# Altium PCB call-2014-06.PcbDoc (part 2 of 2)
Units mm, origin at the board's own origin, x right, y up, seen from the top; angles counter-clockwise.
Board outline 60 x 92 mm, 2 copper layers (Top Layer, Bottom Layer); 65 components, 45 nets, 265 pads, 33 vias.
Unrouted connection lines stored in the file: 4.
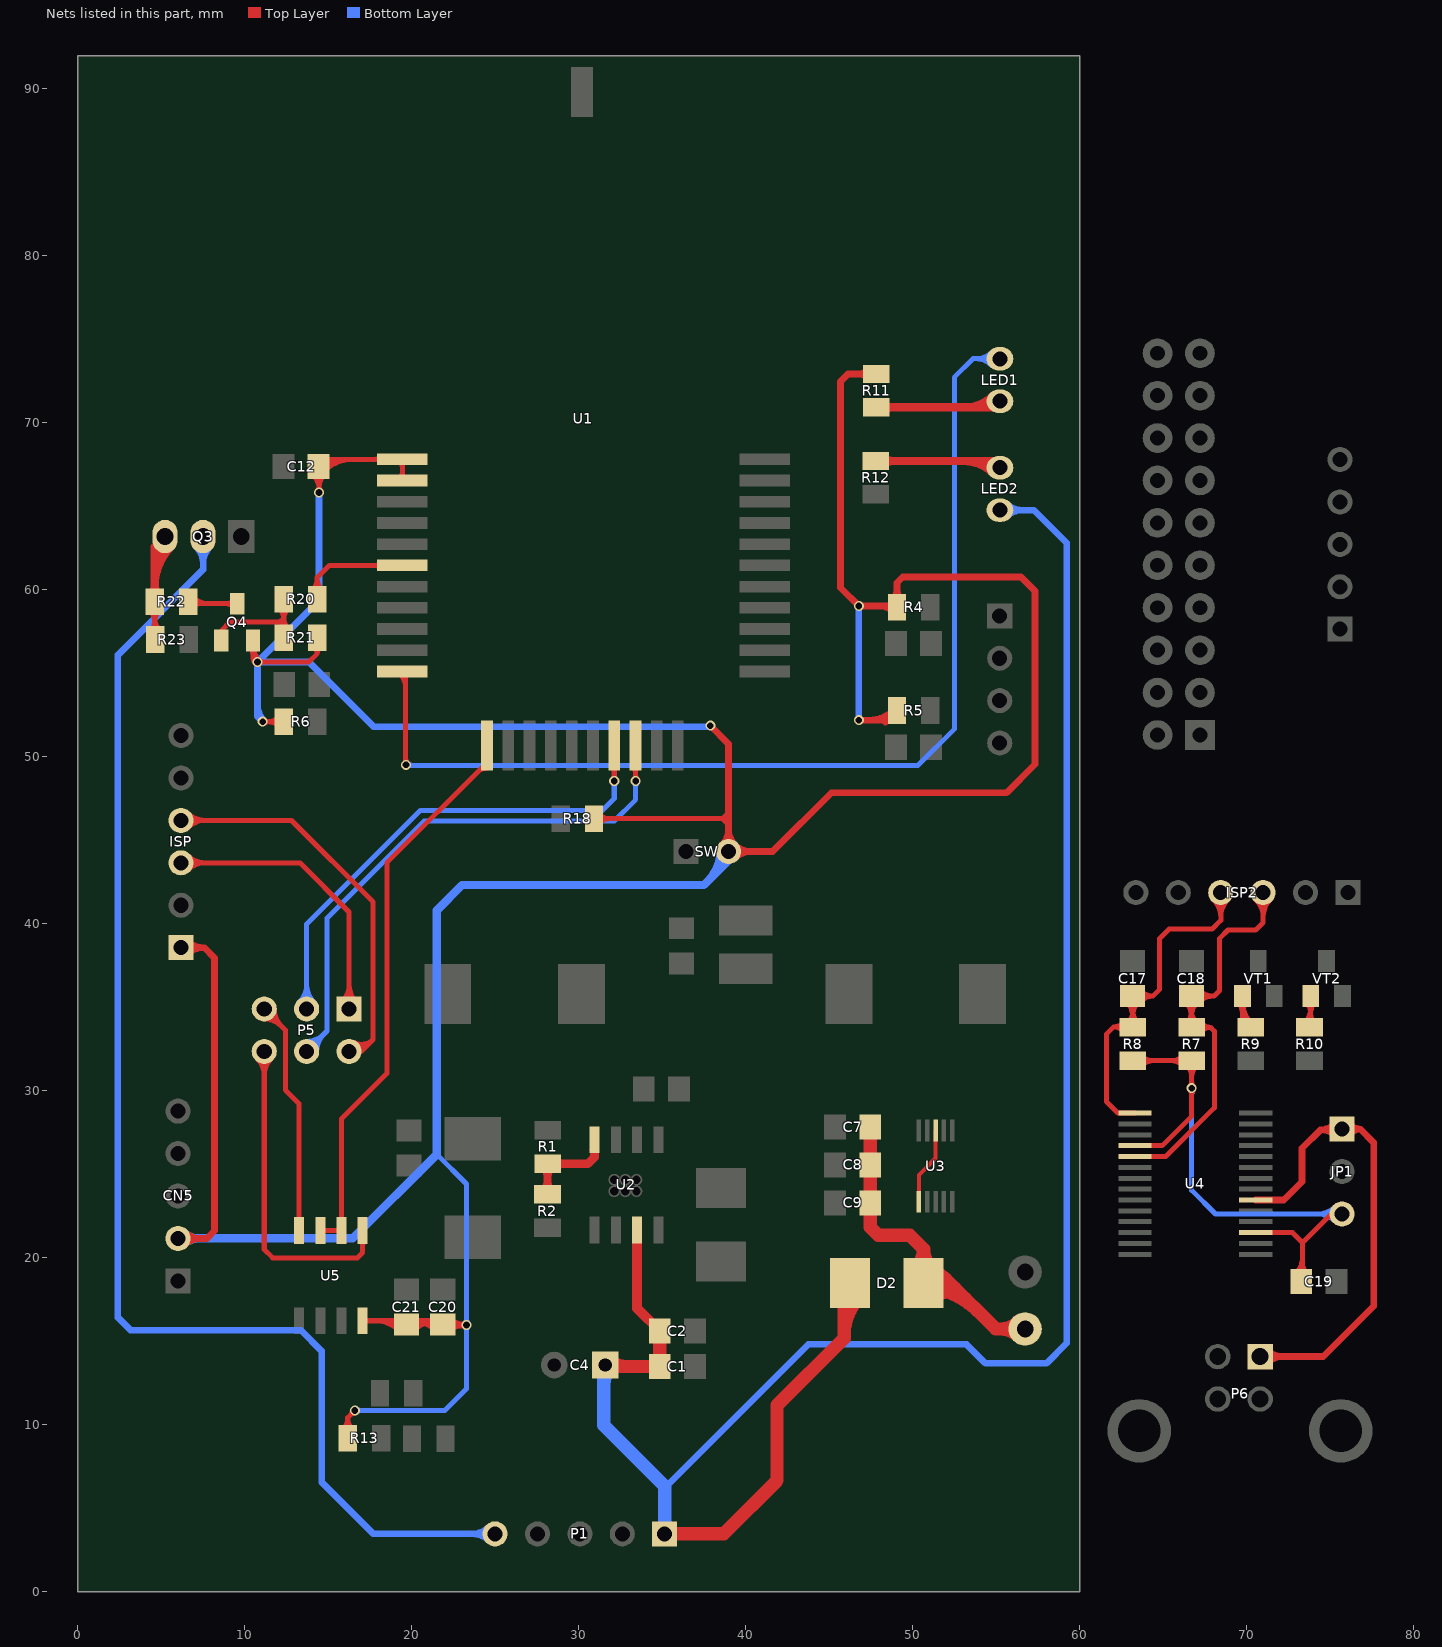
[diagram p2: the nets of this part, all layers, seen from the top]

## Via types
v1: diameter 0.6, hole 0.4, Top Layer to Bottom Layer, 33 vias

## Nets (pads, with @x,y where several pads share a name; then routed paths per layer and width w, separated by ;. In a path a pad name is that pad's centre, name@x,y a point inside that pad or via, vN(x,y) a via of type N, cw(c..) or ccw(c..) an arc to the next point about the centre after c; other vN are vias at no path point) (continued)
NetLED1_1: LED1.1 R11.2 | length 11.4
  Top Layer w0.5: R11.2@47.82,70.93 54.86,70.93 LED1.1@55.23,71.3 ; R11.2@48.282,70.718 cw(c48.794,70.206) 48.794,70.93 cw(c48.794,71.654) R11.2@48.282,71.142 ; 53.15,70.93 ccw(c53.15,73.28) LED1.1@54.812,71.618 ; 54.357,70.93 ccw(c54.357,72.073) LED1.1@55.165,71.265
NetLED2_2: LED2.2 R12.2 | length 11.6
  Top Layer w0.5: R12.2@47.79,67.72 54.83,67.72 LED2.2@55.23,67.32 ; R12.2@48.252,67.508 cw(c48.764,66.996) 48.764,67.72 cw(c48.764,68.444) R12.2@48.252,67.932 ; 53.078,67.72 cw(c53.078,65.268) LED2.2@54.812,67.002 ; 54.285,67.72 cw(c54.285,66.475) LED2.2@55.165,67.355
NetQ3_3: Q3.3 R22.1 R23.2 | length 14.9
  Top Layer w0.3: R22.1@4.337,58.757 cw(c3.654,58.074) 4.62,58.074 cw(c5.586,58.074) R22.1@4.903,58.757 ; R23.2@4.367,57.563 ccw(c3.757,58.173) 4.62,58.173 ; 4.62,58.318 ccw(c5.688,58.318) R23.2@4.933,57.563 ; R22.1@4.62,59.29 4.62,57.06 R23.2@4.65,57.03
  Top Layer w0.5: R22.1@4.408,59.752 ccw(c3.896,60.264) 4.62,60.264 ccw(c5.344,60.264) R22.1@4.832,59.752 ; R22.1@4.62,59.29 4.62,62.579 Q3.3@5.24,63.199 ; 4.62,60.245 cw(c7.944,60.245) Q3.3@5.594,62.595 ; 4.62,61.452 cw(c6.737,61.452) Q3.3@5.24,62.949
NetQ4_1: Q4.1 R20.1 R21.1 | length 10
  Top Layer w0.3: Q4.1@8.611,56.975 8.611,57.552 9.134,58.075 12.126,58.075 12.351,58.3 ; R21.1@12.068,57.663 ccw(c11.385,58.346) 12.351,58.346 ccw(c13.317,58.346) R21.1@12.634,57.663 ; R20.1@12.068,58.917 cw(c11.385,58.234) 12.351,58.234 cw(c13.317,58.234) R20.1@12.634,58.917 ; R21.1@12.351,57.13 R20.1@12.351,59.45
NetQ4_3: Q4.3 R22.2 | length 5.5
  Top Layer w0.3: R22.2@6.62,59.29 6.735,59.175 Q4.3@9.561,59.175 ; R22.2@6.903,59.007 cw(c7.308,58.602) 7.308,59.175 ; R22.2@6.903,59.573 ccw(c7.863,60.533) 7.863,59.175 ; Q4.3@9.367,58.981 ccw(c8.897,58.511) 8.897,59.175 ccw(c8.897,59.839) Q4.3@9.367,59.369
NetR1_1: R1.1 R2.1 U2.4 | length 9.9
  Top Layer w0.5: R2.1@27.928,24.022 ccw(c27.416,24.534) 28.14,24.534 ccw(c28.864,24.534) R2.1@28.352,24.022 ; R1.1@27.938,25.438 cw(c27.45,24.95) 28.14,24.95 ; R2.1@28.14,23.81 R1.1@28.14,25.64 ; 28.14,24.902 cw(c28.898,24.902) R1.1@28.362,25.438 ; R1.1@28.15,25.65 R1.1@28.14,25.64 ; R1.1@28.612,25.438 cw(c29.1,24.95) 29.1,25.64 ; R1.1@28.612,25.862 ccw(c29.148,26.398) 29.148,25.64 ; 30.787,25.857 ccw(c30.385,26.259) U2.4@30.919,26.453 ; U2.4@30.966,27.07 30.966,26.036 30.57,25.64 R1.1@28.14,25.64
NetR9_1: R9.1 VT1.1 | length 5.8
  Top Layer w0.3: VT1.1@69.505,35.283 cw(c68.908,34.685) 69.753,34.685 cw(c70.598,34.685) VT1.1@70,35.283 ; 69.753,34.632 ccw(c70.816,34.632) R9.1@70.064,33.881 ; VT1.1@69.753,35.357 ccw(c71.54,35.357) R9.1@70.276,34.093 ; VT1.1@69.753,35.68 69.753,33.817 R9.1@70.03,33.54
NetR10_1: R10.1 VT2.1 | length 4.7
  Top Layer w0.3: R10.1@73.487,34.093 ccw(c72.635,34.945) 73.84,34.945 ; VT2.1@73.593,35.283 cw(c72.995,34.685) 73.84,34.685 cw(c74.685,34.685) VT2.1@74.087,35.283 ; 73.84,34.607 ccw(c74.567,34.607) R10.1@74.053,34.093 ; VT2.1@73.84,35.68 73.84,34.06 R10.1@74.01,33.89
NetR20_2: R20.2 U1.6 | length 9
  Top Layer w0.3: R20.2@14.068,59.983 ccw(c13.38,60.671) 14.353,60.671 ; R20.2@14.351,59.45 14.353,59.452 14.353,60.741 15.082,61.47 U1.6@19.446,61.47 ; 14.353,60.661 ccw(c15.312,60.661) R20.2@14.634,59.983 ; U1.6@18.155,61.329 ccw(c17.813,60.987) 17.813,61.47 ccw(c17.813,61.953) U1.6@18.155,61.611
PA1: LED1.2 U1.11 | length 67
  Top Layer w0.3: U1.11@19.305,54.979 cw(c18.5,54.174) 19.638,54.174 ; U1.11@19.446,55.12 19.638,54.928 v1@19.638,49.526 ; 19.638,49.97 ccw(c20.116,49.97) v1@19.778,49.632
  Bottom Layer w0.3: v1@19.718,49.495 50.33,49.495 52.499,51.664 52.499,72.729 53.622,73.852 LED1.2@54.899,73.852 ; v1@19.778,49.632 ccw(c20.109,49.963) 20.109,49.495 ; 53.773,73.852 cw(c53.773,72.483) LED1.2@54.741,73.451 ; 53.831,73.852 ccw(c53.831,75.139) LED1.2@54.741,74.229
  other v1: 19.672,49.526
RW: P1.5 Q3.2 | length 85.6
  Bottom Layer w0.4: Q3.2@7.131,62.56 cw(c6.192,61.621) 7.52,61.621 cw(c8.848,61.621) Q3.2@7.909,62.56 ; Q3.2@7.52,63.199 7.52,61.216 2.412,56.108 2.412,16.432 3.165,15.679 13.364,15.679 14.619,14.424 14.619,6.581 17.72,3.48 P1.5@25,3.48 ; P1.5@24.611,3.091 ccw(c23.672,2.152) 23.672,3.48 ccw(c23.672,4.808) P1.5@24.611,3.869
SHINENG: U1.12 U5.2 U5.3 | length 36.2
  Top Layer w0.3: U5.3@14.536,21.64 U5.2@15.806,21.64 15.806,28.326 18.52,31.04 18.52,43.658 24.518,49.656 U1.12@24.518,50.683 ; U5.3@14.642,21.534 cw(c14.898,21.278) 14.898,21.64 cw(c14.898,22.002) U5.3@14.642,21.746 ; U5.2@15.7,21.534 ccw(c15.444,21.278) 15.444,21.64 ccw(c15.444,22.002) U5.2@15.7,21.746 ; U5.2@15.7,22.246 ccw(c15.444,22.502) 15.806,22.502 ccw(c16.168,22.502) U5.2@15.912,22.246 ; 23.967,49.105 cw(c24.518,48.553) U1.12@24.518,49.333
UART_RXD: P5.5 U1.19 | length 37.3
  Top Layer w0.3: U1.19@33.267,49.392 cw(c32.9,49.025) 33.419,49.025 ; v1@33.312,48.665 ccw(c33.056,48.921) 33.419,48.921 ccw(c33.781,48.921) v1@33.525,48.665 ; U1.19@33.408,50.683 33.419,50.673 v1(33.419,48.559) ; 33.419,49.076 cw(c33.865,49.076) U1.19@33.549,49.392
  Bottom Layer w0.3: P5.5@13.72,32.37 14.941,33.591 14.941,40.349 20.753,46.161 32.142,46.161 33.419,47.437 v1(33.419,48.559) ; P5.5@13.72,32.97 ccw(c13.72,34.419) 14.744,33.394 ccw(c15.769,32.37) P5.5@14.32,32.37 ; v1@33.312,48.453 cw(c33.056,48.197) 33.419,48.197 cw(c33.781,48.197) v1@33.525,48.453
"UART_RXD 485": P5.6 U5.1 | length 22.3
  Top Layer w0.3: P5.6@10.756,31.946 cw(c9.731,30.921) 11.18,30.921 cw(c12.629,30.921) P5.6@11.604,31.946 ; P5.6@11.18,32.37 11.18,20.512 11.682,20.01 16.76,20.01 17.076,20.326 U5.1@17.076,21.64 ; U5.1@16.97,21.034 cw(c16.714,20.778) 17.076,20.778 cw(c17.438,20.778) U5.1@17.182,21.034
UART_RXD_USB: C18.2 ISP2.3 ISP.3 P5.1 R7.1 U4.5 | length 54.1
  Top Layer w0.3: ISP.3@6.19,43.66 13.32,43.66 16.26,40.72 P5.1@16.26,34.91 ; ISP.3@6.614,43.236 cw(c7.639,42.211) 7.639,43.66 cw(c7.639,45.109) ISP.3@6.614,44.084 ; P5.1@15.836,35.334 ccw(c14.811,36.359) 16.26,36.359 ccw(c17.709,36.359) P5.1@16.684,35.334 ; U4.5@63.32,26.07 65.155,26.07 68.07,28.985 68.07,33.58 67.84,33.81 ; C18.2@66.344,35.326 cw(c65.49,34.473) 66.697,34.473 cw(c67.904,34.473) C18.2@67.051,35.326 ; R7.1@66.434,34.093 ccw(c65.798,34.729) 66.697,34.729 ; 66.697,34.822 ccw(c67.729,34.822) R7.1@67,34.093 ; C18.2@67.151,35.326 cw(c68.004,34.473) 68.004,35.68 cw(c68.004,36.887) C18.2@67.151,36.034 ; R7.1@67.27,33.549 cw(c67.84,33.057) 67.84,33.81 ; R7.1@67.27,34.071 ccw(c67.84,34.563) 67.84,33.81 ; ISP2.3@70.566,41.456 cw(c69.541,40.431) 70.99,40.431 cw(c72.439,40.431) ISP2.3@71.414,41.456 ; ISP2.3@70.99,41.88 70.99,40.08 70.55,39.64 68.89,39.64 68.39,39.14 68.39,36.02 68.05,35.68 C18.2@66.697,35.68 66.697,33.829 R7.1@66.717,33.81 67.84,33.81
UART_TXD: P5.2 U1.18 | length 34
  Top Layer w0.3: U1.18@31.997,49.392 cw(c31.655,49.05) 32.138,49.05 cw(c32.621,49.05) U1.18@32.279,49.392 ; v1@32.032,48.665 ccw(c31.776,48.921) 32.138,48.921 ccw(c32.5,48.921) v1@32.244,48.665 ; v1(32.138,48.559) U1.18@32.138,50.683
  Bottom Layer w0.3: P5.2@13.296,35.334 ccw(c12.271,36.359) 13.72,36.359 ccw(c15.169,36.359) P5.2@14.144,35.334 ; P5.2@13.72,34.91 13.72,39.993 20.524,46.797 31.423,46.797 32.138,47.512 v1(32.138,48.559) ; v1@32.032,48.453 cw(c31.776,48.197) 32.138,48.197 cw(c32.5,48.197) v1@32.244,48.453
"UART_TXD 485": P5.3 U5.4 | length 17
  Top Layer w0.3: P5.3@11.18,34.31 cw(c11.18,32.861) 12.204,33.886 cw(c13.229,34.91) P5.3@11.78,34.91 ; P5.3@11.18,34.91 12.45,33.64 12.45,30.05 13.266,29.234 U5.4@13.266,21.64 ; U5.4@13.16,22.246 ccw(c12.904,22.502) 13.266,22.502 ccw(c13.628,22.502) U5.4@13.372,22.246
UART_TXD_USB: C17.2 ISP2.4 ISP.4 P5.4 R8.1 U4.1 | length 58.3
  Top Layer w0.3: ISP.4@6.19,46.2 12.81,46.2 17.7,41.31 17.7,33.08 ; ISP.4@6.614,45.776 cw(c7.639,44.751) 7.639,46.2 cw(c7.639,47.649) ISP.4@6.614,46.624 ; P5.4@15.99,32.35 16.97,32.35 17.7,33.08 ; P5.4@16.26,32.37 ccw(c16.601,33.023) 17.122,32.502 ; P5.4@16.399,32.636 ccw(c16.799,33.403) 17.411,32.791 ; P5.4@16.538,32.902 ccw(c16.998,33.782) 17.7,33.08 ; 62.047,33.84 ccw(c62.047,34.703) R8.1@62.657,34.093 ; R8.1@62.629,33.559 ccw(c62.04,33.083) 62.04,33.84 ; C17.2@62.826,35.326 cw(c61.973,34.473) 63.18,34.473 cw(c64.387,34.473) C17.2@63.534,35.326 ; R8.1@62.907,34.093 ccw(c62.248,34.752) 63.18,34.752 ; R8.1@63.18,33.82 C17.2@63.18,35.68 64.39,35.68 ; 63.18,34.8 ccw(c64.18,34.8) R8.1@63.473,34.093 ; R8.1@63.19,33.81 63.16,33.84 62.04,33.84 ; U4.1@63.32,28.67 62.3,28.67 61.6,29.37 61.6,33.4 62.04,33.84 ; C17.2@63.654,35.349 cw(c64.39,34.698) 64.39,35.68 ; C17.2@63.654,36.011 ccw(c64.39,36.662) 64.39,35.68 ; ISP2.4@68.026,41.456 cw(c66.977,40.407) 68.46,40.407 ; ISP2.4@68.45,41.88 68.46,41.87 68.46,40.22 67.93,39.69 65.36,39.69 64.8,39.13 64.8,36.09 64.39,35.68 ; 68.46,40.456 cw(c69.874,40.456) ISP2.4@68.874,41.456
VCC: JP1.1 P6.1 U4.20 | length 33.8
  Top Layer w0.4: U4.20@70.559,23.47 72.23,23.47 73.32,24.56 73.32,26.57 74.42,27.67 ; P6.1@70.815,14.095 74.595,14.095 77.61,17.11 77.61,26.92 76.82,27.71 ; P6.1@71.212,13.697 cw(c72.173,12.736) 72.173,14.095 cw(c72.173,15.453) P6.1@71.212,14.492 ; 74.489,27.67 cw(c74.489,26.479) JP1.1@75.331,27.321 ; JP1.1@75.306,28.072 cw(c74.42,28.847) 74.42,27.67 ; JP1.1@76.16,27.38 cw(c76.82,26.885) 76.82,27.71 ; JP1.1@76.16,28.04 ccw(c76.82,28.535) 76.82,27.71 ; 74.42,27.67 75.68,27.67 JP1.1@75.72,27.71 76.82,27.71
VCC_9V: C7.2 C8.2 C9.2 D2.1 pad.0@56.74,15.75 U3.1 U3.8 | length 42.9
  Top Layer w0.254: U3.1@50.38,23.36 50.38,24.973 51.38,25.973 U3.8@51.38,27.635
  Top Layer w0.8: C7.2@47.51,28.102 47.464,28.056 47.464,21.832 47.946,21.35 49.83,21.35 50.66,20.52 ; D2.1@50.121,18.781 cw(c51.029,17.785) 51.982,18.738 ; D2.1@50.142,19.4 ccw(c49.19,20.52) 50.66,20.52 ; D2.1@50.66,18.99 cw(c50.66,16.404) 52.488,18.233 ; D2.1@51.178,19.4 cw(c52.13,20.52) 50.66,20.52 ; D2.1@51.199,17.599 cw(c52.16,16.548) 53.166,17.555 ; D2.1@51.307,18.019 cw(c52.231,17.348) 52.231,18.49 ; D2.1@51.307,18.961 ccw(c52.231,19.632) 52.231,18.49 ; 52.574,18.147 ccw(c51.594,17.167) 50.66,18.19 cw(c50.66,13.673) 53.854,16.867 ; pad.0@56.316,15.326 ccw(c55.291,14.301) 55.291,15.75 ccw(c55.291,17.199) pad.0@56.316,16.174 ; pad.0@56.74,15.75 54.971,15.75 52.231,18.49 ; 50.66,20.52 D2.1@50.66,18.49 52.231,18.49
VCC_24V: C1.2 C2.2 C4.1 D2.2 LED2.1 P1.1 U2.7 | length 135.8
  Top Layer w0.6: U2.7@33.506,21.67 33.506,16.984 C2.2@34.87,15.62
  Top Layer w0.8: C4.1@31.594,13.59 31.684,13.5 C1.2@34.87,13.5 ; C4.1@31.877,13.873 ccw(c32.777,14.773) 32.777,13.5 ; C1.2@34.78,13.59 C1.2@34.87,13.5 ; C2.2@34.95,15.84 34.87,15.76 C1.2@34.87,13.5 ; P1.1@35.16,3.48 38.695,3.48 41.886,6.671 41.886,11.174 45.9,15.188 D2.2@45.9,18.45 ; P1.1@35.407,3.233 cw(c36.005,2.635) 36.005,3.48 cw(c36.005,4.325) P1.1@35.407,3.727 ; 45.9,15.39 cw(c49.06,15.39) D2.2@46.826,17.624
  Bottom Layer w0.4: 35.16,6.229 43.757,14.826 53.239,14.826 54.378,13.687 58.01,13.687 59.23,14.907 59.23,62.809 57.259,64.78 LED2.1@55.23,64.78 ; LED2.1@55.684,64.426 cw(c56.537,63.573) 56.537,64.78 cw(c56.537,65.987) LED2.1@55.684,65.134
  Bottom Layer w0.8: 31.519,12.443 cw(c32.741,12.443) C4.1@31.877,13.307 ; C4.1@31.594,13.59 31.519,13.515 31.519,9.975 35.16,6.334 ; P1.1@34.913,3.727 ccw(c34.315,4.325) 35.16,4.325 ccw(c36.005,4.325) P1.1@35.407,3.727 ; P1.1@35.16,3.48 35.16,6.229
VDD33: C12.2 C19.2 C20.2 C21.2 CN5.2 ISP.1 JP1.3 Q4.2 R4.2 R5.2 R6.2 R7.2 R8.2 R11.1 R13.2 R18.2 R21.2 SW.2 U1.1 U1.2 U4.4 U4.17 U5.8 | length 346.4
  Top Layer w0.3: Q4.2@10.317,56.556 cw(c9.879,56.118) 10.498,56.118 ; 10.498,55.991 ccw(c11.085,55.991) v1@10.67,55.576 ; 10.498,56.055 cw(c11.206,56.055) Q4.2@10.705,56.556 ; Q4.2@10.498,56.715 ccw(c11.809,56.715) 10.882,55.788 ccw(c11.138,56.044) 11.138,55.682 ccw(c11.138,55.32) v1@10.882,55.576 ; Q4.2@10.511,56.975 10.498,56.962 10.498,55.96 v1(10.776,55.682) 13.85,55.682 14.351,56.183 ; v1(11.087,52.116) R6.2@12.351,52.116 ; v1@11.193,52.01 cw(c11.449,51.754) 11.449,52.116 cw(c11.449,52.478) v1@11.193,52.222 ; R6.2@12.068,51.833 ccw(c11.385,51.15) 11.385,52.116 ccw(c11.385,53.082) R6.2@12.068,52.399 ; C12.2@14.08,66.927 cw(c13.159,66.006) v1@14.462,66.006 ; R21.2@14.149,56.535 cw(c13.944,56.183) 14.351,56.183 ; R21.2@14.351,57.13 14.351,56.183 ; v1@14.356,65.943 ccw(c14.1,66.199) 14.462,66.199 ccw(c14.824,66.199) v1@14.568,65.943 ; C12.2@14.363,67.552 cw(c15.011,66.904) C12.2@15.011,67.82 ; C12.2@14.434,67.381 C12.2@14.462,67.353 ; v1(14.462,65.837) C12.2@14.462,67.353 ; 14.462,66.141 cw(c15.574,66.141) C12.2@14.788,66.927 ; R21.2@14.553,56.535 ccw(c14.758,56.183) 14.351,56.183 ; C12.2@14.575,67.34 cw(c15.735,66.18) 15.735,67.82 ; C12.2@14.788,67.127 cw(c16.46,65.455) 16.46,67.82 ; R13.2@15.897,9.733 ccw(c15.214,10.416) 16.18,10.416 ccw(c17.146,10.416) R13.2@16.463,9.733 ; R13.2@16.18,9.2 16.18,10.439 v1(16.604,10.863) ; v1@16.454,10.863 cw(c16.092,10.863) 16.348,10.607 cw(c16.604,10.351) v1@16.604,10.713 ; U5.8@17.076,16.24 21.64,16.24 C20.2@21.87,16.01 ; U5.8@17.182,16.134 cw(c17.438,15.878) 17.438,16.24 cw(c17.438,16.602) U5.8@17.182,16.346 ; 17.828,16.24 cw(c17.828,14.248) C21.2@19.236,15.656 ; U1.1@18.155,67.679 ccw(c17.813,67.337) 17.813,67.82 ccw(c17.813,68.303) U1.1@18.155,67.961 ; 18.552,16.24 cw(c18.552,14.972) C21.2@19.449,15.869 ; 18.938,16.24 ccw(c18.938,16.662) C21.2@19.236,16.364 ; U1.2@19.305,66.691 ccw(c18.963,67.033) 19.446,67.033 ccw(c19.929,67.033) U1.2@19.587,66.691 ; U1.1@19.305,67.679 cw(c18.963,67.337) 19.446,67.337 cw(c19.929,67.337) U1.1@19.587,67.679 ; U1.2@19.446,66.55 U1.1@19.446,67.82 14.929,67.82 C12.2@14.462,67.353 ; C21.2@19.931,15.869 cw(c20.828,14.972) 20.828,16.24 ; C21.2@20.008,16.24 cw(c20.008,14.248) C20.2@21.416,15.656 ; C21.2@20.144,15.656 cw(c21.552,14.248) C20.2@21.552,16.24 ; C21.2@20.144,16.364 ccw(c20.442,16.662) 20.442,16.24 ; 20.732,16.24 cw(c20.732,14.972) C20.2@21.629,15.869 ; 21.118,16.24 ccw(c21.118,16.662) C20.2@21.416,16.364 ; R18.2@30.841,46.52 R18.2@31.138,46.817 ; R18.2@30.925,46.304 38.624,46.304 ; R18.2@31.208,46.021 cw(c31.891,45.338) 31.891,46.304 cw(c31.891,47.27) R18.2@31.208,46.587 ; 38.984,45.944 38.624,46.304 ; 38.984,46.664 38.624,46.304 ; R8.2@63.19,31.81 R7.2@66.717,31.81 66.717,28.487 64.95,26.72 U4.4@63.32,26.72 ; R8.2@63.723,31.527 cw(c64.406,30.844) 64.406,31.81 cw(c64.406,32.776) R8.2@63.723,32.093 ; R7.2@66.184,31.527 ccw(c65.501,30.844) 65.501,31.81 ccw(c65.501,32.776) R7.2@66.184,32.093 ; R7.2@66.434,31.527 cw(c65.751,30.844) 66.717,30.844 cw(c67.682,30.844) R7.2@67,31.527 ; v1@66.611,30.064 cw(c66.355,29.808) 66.717,29.808 cw(c67.079,29.808) v1@66.823,30.064 ; v1@66.611,30.276 ccw(c66.355,30.532) 66.717,30.532 ccw(c67.079,30.532) v1@66.823,30.276 ; U4.17@70.559,21.52 72.74,21.52 73.35,20.91 ; C19.2@72.926,19.034 ccw(c71.904,20.056) 73.35,20.056 ; C19.2@73.139,18.821 ccw(c72.628,19.332) 73.35,19.332 ; C19.2@73.28,18.58 73.35,18.65 73.35,20.91 ; 73.35,19.718 ccw(c74.318,19.718) C19.2@73.634,19.034 ; JP1.3@75.72,22.63 75.07,22.63 73.35,20.91
  Top Layer w0.4: CN5.2@6.02,21.17 7.742,21.17 8.201,21.629 8.201,37.964 7.585,38.58 ISP.1@6.19,38.58 ; CN5.2@6.409,20.781 cw(c7.348,19.842) 7.348,21.17 cw(c7.348,22.498) CN5.2@6.409,21.559 ; ISP.1@6.579,38.191 cw(c7.518,37.252) 7.518,38.58 cw(c7.518,39.908) ISP.1@6.579,38.969 ; C20.2@21.87,16.01 21.893,15.987 v1(23.289,15.987) ; C20.2@22.288,15.692 cw(c23.001,14.979) v1@23.001,15.987 ; C20.2@22.288,16.328 ccw(c23.112,17.152) v1@23.112,15.987 ; v1(37.893,51.871) 38.984,50.78 SW.2@38.984,44.335 41.62,44.335 45.135,47.85 55.617,47.85 57.327,49.56 57.327,59.936 56.489,60.774 49.417,60.774 49.07,60.427 R4.2@49.07,58.97 49.004,59.036 v1(46.787,59.036) 45.689,60.134 45.689,72.479 46.14,72.93 R11.1@47.82,72.93 ; SW.2@38.595,44.724 ccw(c37.656,45.663) 38.984,45.663 ccw(c40.312,45.663) 39.373,44.724 ccw(c40.312,45.663) 40.312,44.335 ccw(c40.312,43.007) SW.2@39.373,43.946 ; v1(46.787,52.2) 48.49,52.2 R5.2@49.07,52.78 ; R11.1@47.323,72.683 ccw(c46.725,72.085) 46.725,72.93 ccw(c46.725,73.775) R11.1@47.323,73.177 ; 47.428,52.2 ccw(c47.428,54.172) R5.2@48.823,52.777 ; 48.066,59.036 cw(c48.066,57.966) R4.2@48.823,58.723 ; 48.365,52.075 cw(c48.755,51.685) R5.2@48.948,52.202 ; 48.384,59.036 ccw(c48.384,59.656) R4.2@48.823,59.217 ; 48.394,52.2 ccw(c48.394,53.206) R5.2@49.105,52.495 ; R4.2@48.823,59.467 ccw(c48.225,60.065) 49.07,60.065 ccw(c49.915,60.065) R4.2@49.317,59.467
  Bottom Layer w0.3: v1(16.604,10.863) 21.99,10.863 23.289,12.162 23.289,24.427 21.508,26.208 ; v1@16.71,10.757 cw(c16.966,10.501) 16.966,10.863 cw(c16.966,11.225) v1@16.71,10.969 ; v1@23.183,15.881 cw(c22.927,15.625) 23.289,15.625 cw(c23.651,15.625) v1@23.395,15.881 ; v1@23.183,16.093 ccw(c22.927,16.349) 23.289,16.349 ccw(c23.651,16.349) v1@23.395,16.093 ; v1@66.611,30.064 cw(c66.355,29.808) 66.717,29.808 cw(c67.079,29.808) v1@66.823,30.064 ; v1(66.717,30.17) 66.717,24.053 68.14,22.63 JP1.3@75.72,22.63 ; JP1.3@75.296,22.206 ccw(c74.271,21.181) 74.271,22.63 ccw(c74.271,24.079) JP1.3@75.296,23.054
  Bottom Layer w0.4: 10.776,53.108 ccw(c12.079,53.108) v1@11.158,52.187 ; v1(11.087,52.116) 10.776,52.427 v1(10.776,55.682) ; v1(14.462,65.837) 14.462,59.368 v1(10.776,55.682) ; v1(37.893,51.871) 37.821,51.799 17.742,51.799 13.859,55.682 v1(10.776,55.682) ; v1(46.787,52.2) v1(46.787,59.036)
  Bottom Layer w0.5: CN5.2@6.02,21.17 16.47,21.17 21.508,26.208 21.508,40.813 23.024,42.329 37.501,42.329 38.984,43.812 SW.2@38.984,44.335 cw(c37.724,44.334) 38.615,43.443 ; CN5.2@6.374,20.816 cw(c7.227,19.963) 7.227,21.17 cw(c7.227,22.377) CN5.2@6.374,21.524 ; 37.763,42.591 ccw(c36.021,44.332) SW.2@38.484,44.335
pads on no net: JTAG.17 JTAG.19 P6.5 P6.6 U1. U1.3 U1.4 U1.5 U1.8 U1.9 U1.13 U1.16 U1.17 U1.21 U1.23 U1.24 U1.25 U1.26 U1.27 U1.28 U1.29 U2.2 U2.3 U2.5 U4.2 U4.3 U4.6 U4.8 U4.9 U4.10 U4.11 U4.12 U4.14 U4.19 U4.22 U4.24 U4.27 U4.28

## Polygon pours and split planes (outlines as drawn)
GND on Top Layer "Top Layer-No Net 1" (solid, remove dead copper, pour order 1000): 61.24,12.35 65.33,12.35 66.14,11.54 67.58,10.1 72.16,10.1 74.43,12.37 76.3,12.37 78.36,12.37 79.15,13.16 79.15,43.67 78.24,44.58 61.4,44.58 60.29,43.47 60.29,13.3 61.24,12.35
VCC_9V on Top Layer "Top Layer-No Net 1" (solid, remove dead copper, pour order 1001): 50.514,22.599 50.514,24.266 50.391,24.389 50.229,24.389 48.463,26.155 47.857,26.155 47.857,25.078 48.019,24.916 48.437,24.916 50.125,23.228 50.125,22.596 50.18,22.541 50.456,22.541
NetC3_2 on Top Layer "Top Layer-No Net 1" (solid, pour order 1002): 34.566,20.31 35.74,20.31 35.85,20.42 35.85,22.03 36.77,22.95 39.784,22.95 40.042,23.208 40.042,32.923 38.515,34.45 34.29,34.45 33.37,35.37 33.37,40.86 33.06,41.17 28.22,41.17 27.94,40.89 27.94,31.54 28.27,31.21 35.72,31.21 35.92,31.01 35.92,24.02 34.462,22.562 34.462,20.414
GND on Top Layer "Top Layer-No Net 1" (solid, pour order 1003): 50.514,26.859 50.514,29.491 49.187,30.818 44.005,30.818 42.944,31.879 42.944,36.853 41.575,38.222 35.095,38.222 34.797,37.924 34.797,35.759 35.095,35.461 39.366,35.461 40.961,33.866 40.961,30.959 42.764,29.156 48.412,29.156 48.773,28.795 48.773,26.871 48.939,26.705 50.36,26.705
NetC5_1 on Top Layer "Top Layer-No Net 1" (solid, pour order 1004): 43.551,32.259 43.551,38.093 42.412,39.232 35.01,39.232 34.744,39.498 34.744,41.433 34.934,41.623 47.423,41.623 48.277,40.769 48.277,32.236 47.659,31.618 44.192,31.618
NetL2_1 on Top Layer "Top Layer-No Net 1" (solid, pour order 1005): 52.424,41.554 56.302,41.554 56.646,41.21 56.646,29.702 56.411,29.467 52.25,29.467 52.053,29.664 52.053,41.183
GND on Top Layer "Top Layer-No Net 1" (solid, pour order 1006): 51.745,28.434 51.745,25.799 50.745,24.799 50.745,22.644 50.919,22.47 51.964,22.47 52.013,22.519 52.013,24.72 52.572,25.279 52.572,28.44 52.53,28.482 51.793,28.482
GND on Top Layer "Top Layer-No Net 1" (solid, pour order 1007): 51.802,22.741 54.035,20.508 58.171,20.508 58.471,20.208 58.471,18.249 58.195,17.973 55.037,17.973 50.745,22.265 50.745,22.75
NetC5_1 on Top Layer "Top Layer-No Net 1" (solid, pour order 1008): 25.385,40.751 25.385,41.344 26.01,41.969 34.208,41.969 34.744,41.433 35.259,40.918 36.284,40.918 38.37,40.918 38.464,41.012 38.417,41.059 38.417,41.499 37.915,41.499 37.586,41.828 37.586,45.382 37.285,45.683 35.026,45.683 34.647,45.304 33.755,44.412 31.439,44.412 20.317,44.412 19.558,43.653 19.293,43.388 19.293,40.751
GND on Top Layer "Top Layer-No Net 1" (solid, pour order 1009): 34.671,25.489 34.671,23.32 34.495,23.144 32.945,23.144 32.724,22.923 32.724,18.275 31.89,17.441 18.923,17.441 18.588,17.776 18.588,25.89 18.933,26.235 20.475,26.235 20.566,26.144 20.566,23.849 21.888,22.527 29.082,22.527 29.523,22.968 29.523,24.796 29.847,25.12 30.833,25.12 31.403,25.69 34.47,25.69
NetC5_1 on Top Layer "Top Layer-No Net 1" (solid, pour order 1010): 25.022,41.114 19.656,41.114 19.293,40.751 19.293,30.947 18.506,30.16 18.506,27.392 18.92,26.978 21.263,26.978 21.452,26.789 21.452,25.933 21.708,25.677 25.602,25.677 25.944,26.019 25.944,26.719 26.314,27.089 29.057,27.089 29.302,27.334 29.302,30.106 28.904,30.504 25.723,30.504 25.393,30.834 25.393,40.743
GND on Top Layer "Top Layer-No Net 1" (solid, remove dead copper, pour order 1011): 34.109,1.357 36.117,1.357 36.632,1.872 41.528,6.768 41.528,9.718 41.528,11.13 44.635,14.237 45.199,14.801 45.199,19.886 44.101,20.984 40.461,20.984 32.741,20.984 30.827,19.07 30.691,18.934 24.609,18.934 20.416,18.934 18.923,17.441 18.923,14.051 20.109,14.051 21.06,13.1 21.469,12.691 21.469,8.402 21.469,5.616 25.713,1.372 34.124,1.372 34.226,1.474
GND on Bottom Layer "Top Layer-No Net 1" (solid, pour order 1012): 60.81,0.61 78.64,0.61 79.11,1.08 79.11,43.71 78.2,44.62 61.45,44.62 60.65,43.82 60.65,0.77
GND on Bottom Layer "Top Layer-No Net 1" (solid, remove dead copper, pour order 1013): 12.425,0.192 48.113,0.192 48.799,0.878 48.799,4.137 55.764,11.102 58.679,11.102 59.237,11.66 59.237,75.952 57.939,77.25 42.311,77.25 40.951,75.89 40.951,52.885 39.57,51.504 20.136,51.504 19.339,52.301 19.339,75.319 17.519,77.139 2.003,77.139 0.386,75.522 0.386,11.862 1.073,11.175 4.158,11.175 11.187,4.146 11.187,1.43

## Keep-outs
Keep-Out Layer:
  circle w0.254: c10,11 r1.7
  circle w0.254: c10,81 r1.7
  circle w0.254: c50,81 r1.7
  circle w0.254: c50,11 r1.7
  lines w0.254: 1.199,10.981 cw(c1.199,12.18) 0,12.18 0,79.913 cw(c1.072,79.913) 1.072,80.985 4.045,80.985 11,87.94 11,90.73 ; 1.199,10.995 4.085,10.995 11,4.08 11,1.016 ccw(c12.016,1.016) 12.016,0 13,0 47,0 47.73,0 ccw(c47.73,1.27) 49,1.27 49,4.07 55.93,11 58.801,11 ccw(c58.801,12.199) 60,12.199 60,13 60,79.35 ; 11,90.678 11,90.73 ; 12.27,92 ccw(c12.27,90.73) 11,90.73 ; 13.28,92 14.01,92 48.01,92 ; 47.805,92 cw(c47.805,90.805) 49,90.805 49,87.93 55.93,81 58.928,81 cw(c58.928,79.928) 60,79.928 ; 60,45.31 79.4,45.31 79.45,45.26 ; 60.01,79.22 cw(c60.73,79.22) 60.73,79.94 61.61,79.94 78.28,79.94 78.85,79.94 cw(c78.85,79.34) 79.45,79.34 79.45,0.6 cw(c78.82,0.6) 78.82,-0.03 77.92,-0.03 61.72,-0.03 60.62,-0.03 ; 60.01,79.94 60.01,0.6 ccw(c60.62,0.6) 60.62,-0.01

## Silkscreen, mask and mechanical layers (free items; w line width, h text height)
Top Overlay:
  circle w0.254: c10,11 r3
  circle w0.254: c50,11 r3
  circle w0.254: c50,81 r3
  circle w0.254: c10,81 r3
  lines w0.254: 21.317,29.244 22.137,29.244 ; 21.737,28.854 21.737,29.674 ; 37.072,41.233 37.892,41.233 ; 37.492,40.843 37.492,41.663 ; 52.45,63.57 53.27,63.57 ; 52.56,70.44 53.38,70.44 ; 52.87,63.18 52.87,64 ; 52.98,70.02 52.98,70.84
  text "KEY2" at 58.52,57.58 h0.8 r90
  text "KEY3" at 58.54,52.04 h0.8 r90
  text "3.3V" at 38.219,46.875 h0.8
  text "+5V" at 73.16,27.07 h0.8 r90
  text "+3.3V" at 73.21,20.27 h0.8 r90
  text "GND" at 24.14,18.14 h0.8
  text "RW" at 25.2,6.04 h0.8 r90
  text "485_B" at 27.84,5.97 h0.8 r90
  text "GND" at 32.15,5.967 h0.8
  text "+24V" at 35.05,5.967 h0.8
  text "485_A" at 30.3,5.89 h0.8 r90

## Dimensions
14.01,92 to 13,0 on Keep-Out Layer
0,12.18 to 79.45,0.6 on Keep-Out Layer

## Text inside footprints (layer, text, board x,y; h text height)
CN5: Top Overlay "1" at 2.94,18.12 h0.8; Top Overlay "5" at 2.72,28.94 h0.8
CN5-1: Top Overlay "1" at 79.03,57.48 h0.8 r90; Top Overlay "5" at 78.85,68.58 h0.8 r90
ISP: Top Overlay "6" at 2.76,52.36 h0.8; Top Overlay "1" at 2.72,37.34 h0.8
ISP2: Top Overlay "6" at 61.65,42.54 h0.8; Top Overlay "1" at 77.45,42.6 h0.8
JP1: Top Overlay "1" at 77.03,28.53 h0.8; Top Overlay "3" at 76.72,21.09 h0.8
L1: Top Overlay "GS" at 25.49,35.27 h0.8
L2: Top Overlay "GS" at 50.956,36.41 h0.8 r180
P1: Top Overlay "5" at 23.53,2.05 h0.8; Top Overlay "1" at 36.32,2.03 h0.8
P5: Top Overlay "6" at 8.798,31.752 h0.8; Top Overlay "3" at 8.732,35.163 h0.8; Top Overlay "1" at 18.311,34.933 h0.8; Top Overlay "4" at 18.179,31.752 h0.8
P7: Top Overlay "1" at 53.442,58.704 h0.8 r270; Top Overlay "4" at 53.442,51.084 h0.8 r270
Q3: Top Overlay "1" at 9.705,65.741 h0.8; Top Overlay "2" at 7.088,65.741 h0.8; Top Overlay "3" at 4.701,65.664 h0.8